# Altium PCB kvm.PcbDoc
Units mil, origin at the board's own origin, x right, y up, seen from the top; angles counter-clockwise.
Board outline 6305.65 x 2713.58 mil, 4 copper layers (Top Layer, GND 1, GND2, Bottom Layer), stack 61.12 mil thick; 1 components, 20 nets, 36 pads, 389 vias.
Unrouted connection lines stored in the file: 15.
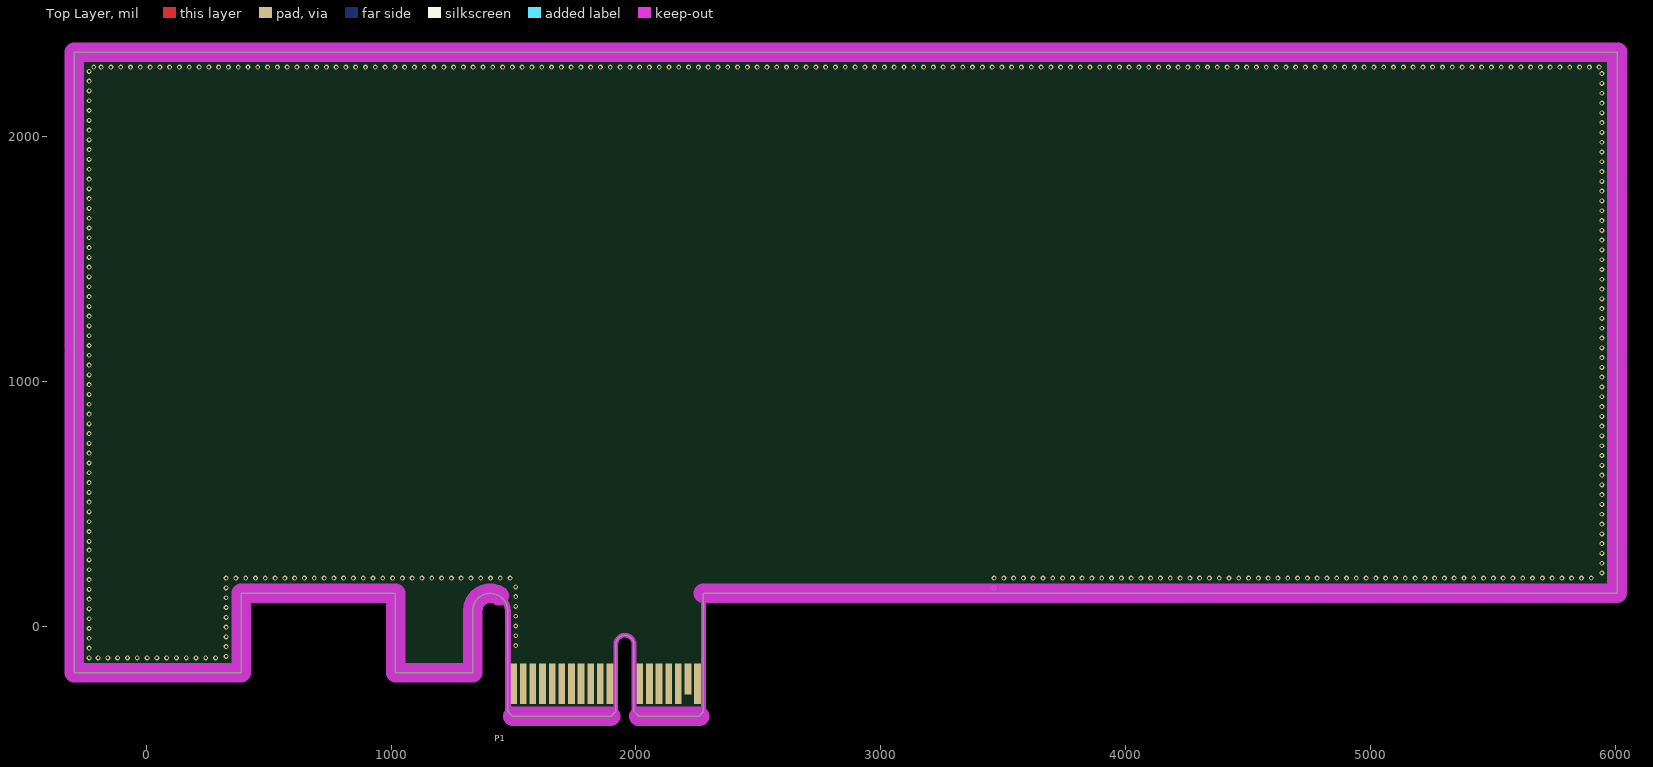
[diagram p0: Top Layer view]
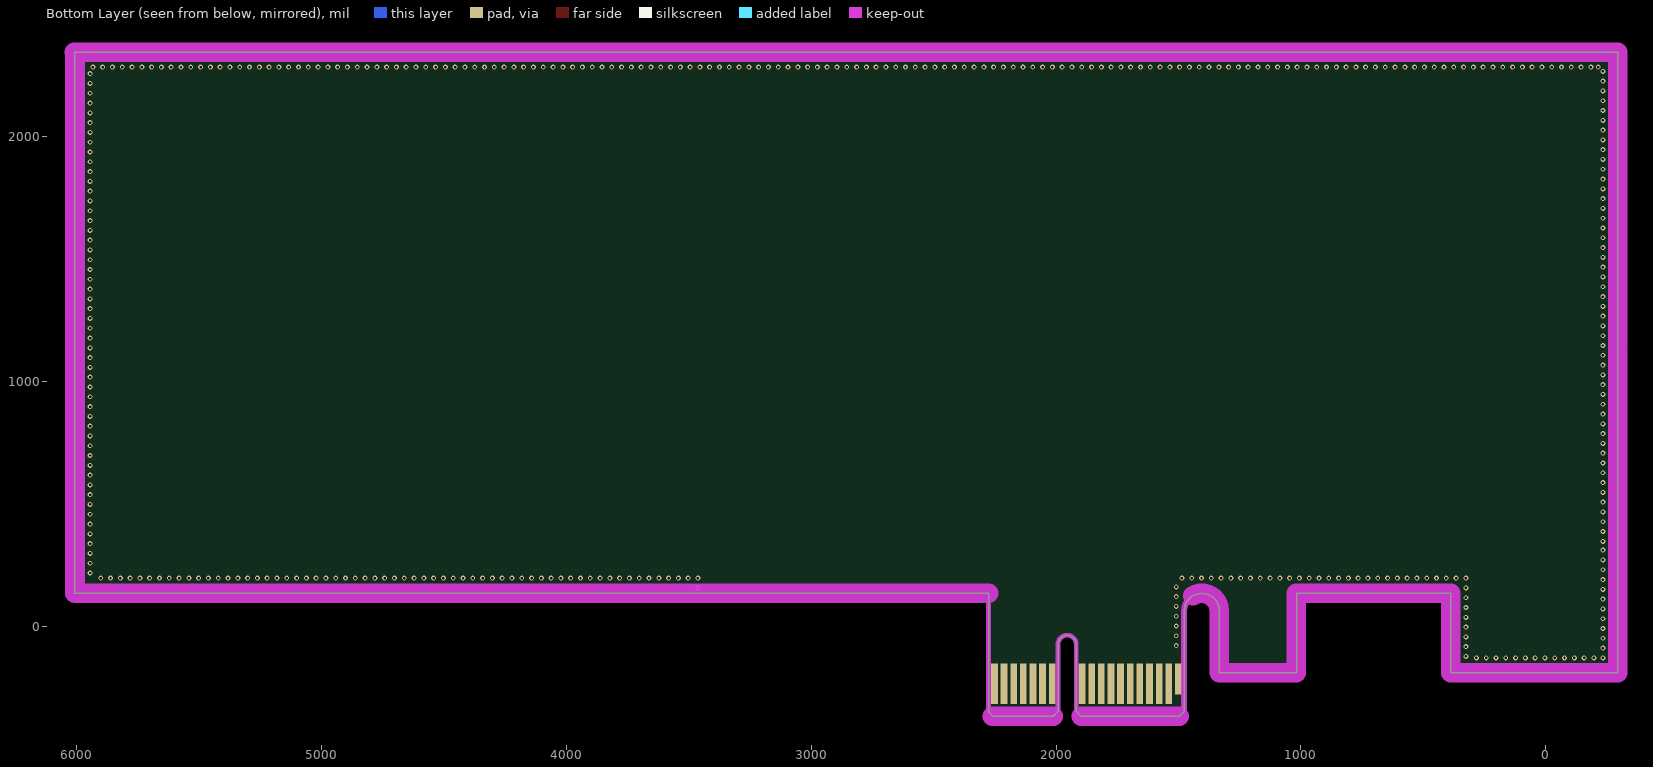
[diagram p1: Bottom Layer view, seen from below]
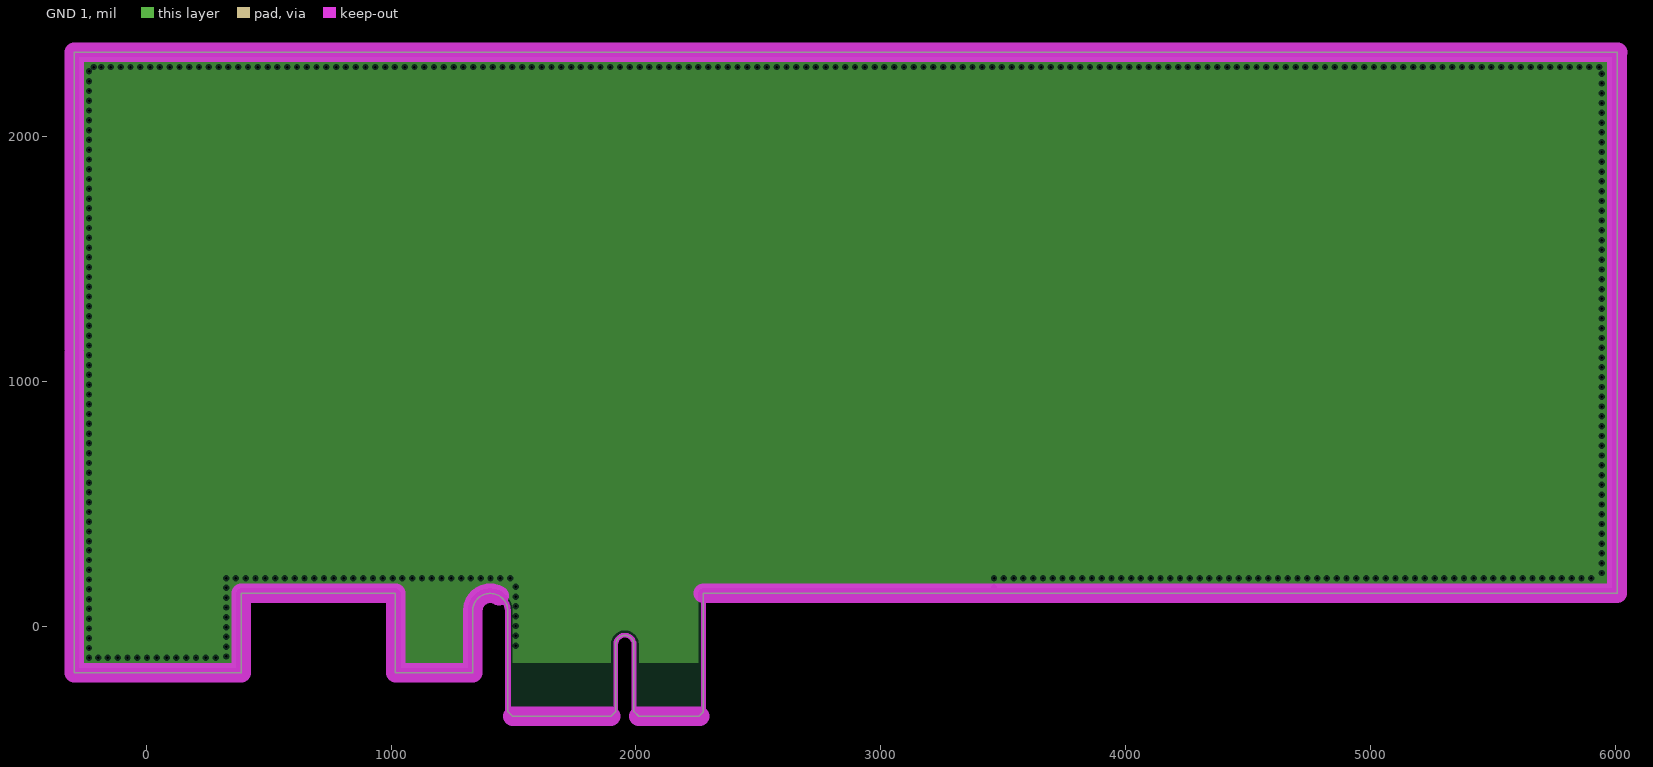
[diagram p2: GND 1, clearances drawn from the general rule]
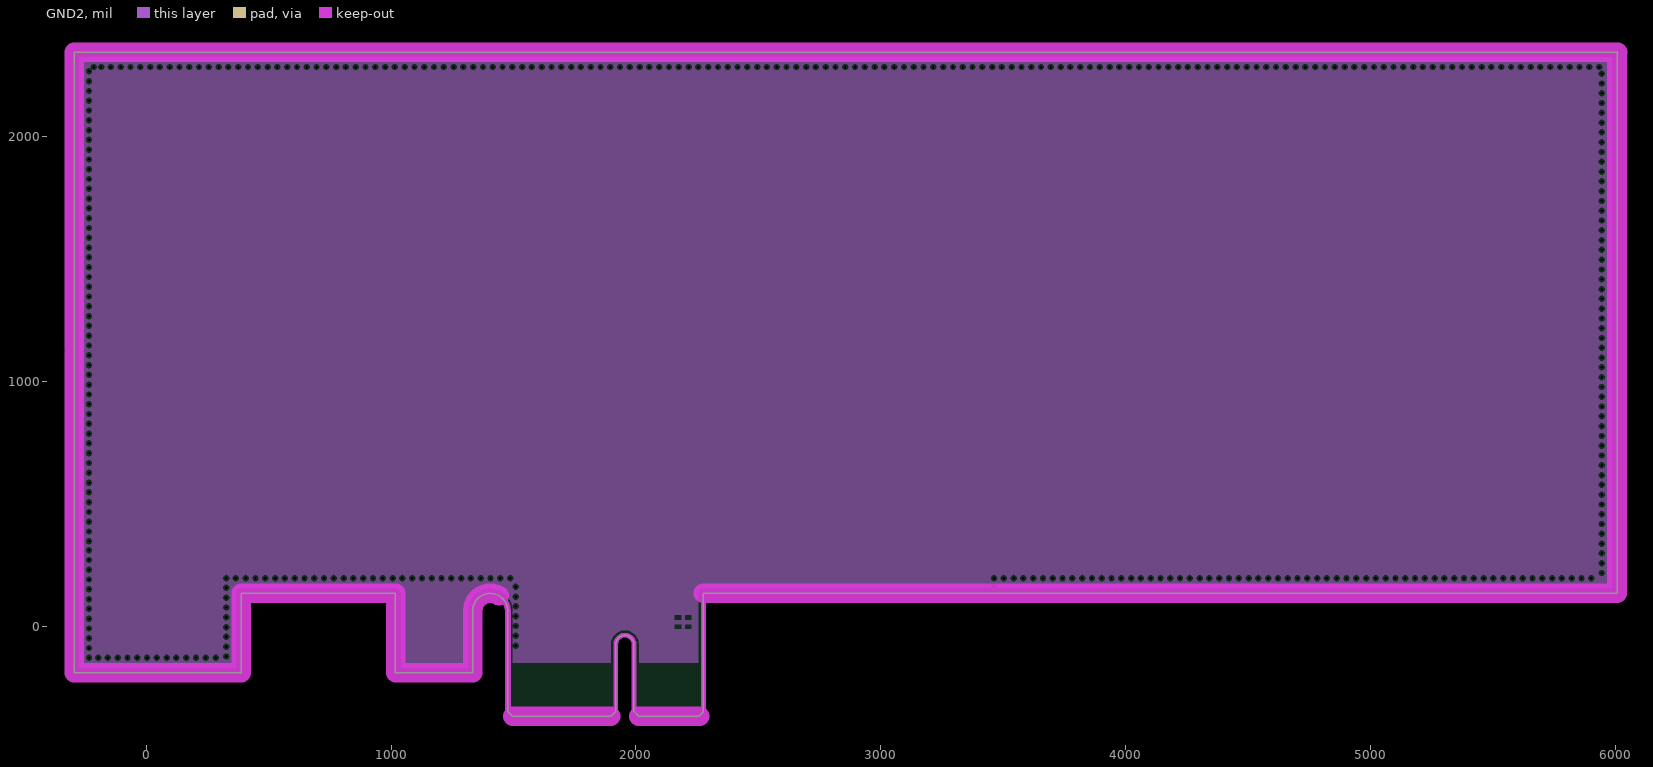
[diagram p3: GND2, clearances drawn from the general rule]

## Layer stack, top to bottom
Board Layer Stack Top Solder: solder mask 0.6, SM-001, Dk 4
Top Layer: signal copper 1.6
Dielectric 1: prepreg 3.36, 1078RC69, Dk 4.12
GND 1: plane copper 0.6
Dielectric 4: core 50, 1078, Dk 4.4
GND2: plane copper 0.6
Dielectric 7: prepreg 3.36, 1078RC69, Dk 4.12
Bottom Layer: signal copper 1.6
Board Layer Stack Bottom Solder: solder mask 0.6, SM-001, Dk 4

## Board outline
2257.99,-368.34 2276,-350.33 2276,134.43 6009.86,134.43 6010.13,134.7 6010.13,2344.94 6009.86,2345.2 -295.25,2345.2 -295.52,2344.94 -295.25,-191.16 387.21,-191.16 387.48,-190.89 387.48,133.65 1017.46,133.65 1017.46,-190.89 1017.73,-191.16 1332.75,-191.16 1333.01,-190.89 1333.01,62.06 cw(c1404.57,62.06) 1476.12,62.06 1476.12,-348.33 1476.2,-348.52 1495.98,-368.3 1496.17,-368.38 1897.65,-368.38 1897.84,-368.29 1917.6,-348.52 1917.68,-348.33 1917.68,-74.8 cw(c1954.74,-74.8) 1991.8,-74.8 1991.8,-348.38 1991.88,-348.57 2011.57,-368.26 2011.76,-368.34

## Design rules (kind name [scope] priority, off if disabled: settings)
AcuteAngle [All] p1: isadvanced=TRUE minimum=6.00000000000000E+0001 checktracksonly=FALSE
AssemblyTestPointUsage [All] p1: isadvanced=TRUE
AssemblyTestpoint [All] p1: isadvanced=TRUE testpointundercomponent=TRUE minsize=40 maxsize=100 preferedsize=60 minholesize=0 maxholesize=40 preferedholesize=32 testpointgrid=1 usegrid=TRUE gridtolerance=0.01 allowsidetop=TRUE allowsidebottom=TRUE
Clearance Clearance_Differential [InAnyDifferentialPair vs OnTopLayer    or OnBottomLayer    or OnLayer('PWR/SIG1')] p1: isadvanced=TRUE gap=5 ignorepadtopadclearanceinfootprint=TRUE except(0: SMDPad-Region; 4: Arc-Arc Arc-Track Track-Track; 8: Arc-Hole Track-Hole SMDPad-Hole THPad-Hole Via-Hole Fill-Hole Poly-Hole Region-Hole Text-Hole; 10: Arc-Poly Track-Poly)
Clearance Clearance_BGA [WithinRoom('08_25G2SS Port 0 Port 1 - SFP28') or WithinRoom('08_25G2SS Port 0 - SFP28')] p2: isadvanced=TRUE gap=5 ignorepadtopadclearanceinfootprint=TRUE except(0: SMDPad-Via SMDPad-Hole; 4: Track-SMDPad; 8: Arc-Hole Track-Hole THPad-Hole Via-Hole Fill-Hole Poly-Hole Region-Hole Text-Hole)
Clearance "Clearance_SNC_Via on Pad" [InPadClass('Via on Pad')] p3: isadvanced=TRUE gap=5 ignorepadtopadclearanceinfootprint=TRUE except(0: SMDPad-Via SMDPad-Region SMDPad-Hole; 8: Arc-Hole Track-Hole THPad-Hole Via-Hole Fill-Hole Poly-Hole Region-Hole Text-Hole)
Clearance Clearance_1 [OnMid vs OnMid] p4: gap=10 ignorepadtopadclearanceinfootprint=FALSE sourcerule=53 cellrowname=All cellrowtype=0 cellcolname=All cellcoltype=0 innerlayers=TRUE
Clearance Clearance_2 [(ExistsOnLayer('Top Layer') Or ExistsOnLayer('Bottom Layer')) vs (ExistsOnLayer('Top Layer') Or ExistsOnLayer('Bottom Layer'))] p5: gap=10 ignorepadtopadclearanceinfootprint=FALSE sourcerule=53 cellrowname=All cellrowtype=0 cellcolname=All cellcoltype=0 outerlayers=TRUE
Clearance [All] p6: gap=5 ignorepadtopadclearanceinfootprint=FALSE except(8: Arc-Hole Track-Hole SMDPad-Hole THPad-Hole Via-Hole Fill-Hole Poly-Hole Region-Hole Text-Hole; 15: Fill-Fill Fill-Poly Fill-Region Poly-Poly Poly-Region Region-Region) ismatrix=TRUE
ComponentClearance ComponentClearance_TP [HasFootprint('TP_SMD_030RD')] p1: isadvanced=TRUE gap=10 collisioncheckmode=3 verticalgap=100000 showdistances=FALSE
ComponentClearance [not HasFootprint ('TP_SMD_030RD')] p2: isadvanced=TRUE gap=10 collisioncheckmode=3 verticalgap=10 showdistances=FALSE
DiffPairsRouting DifferentialPairsRouting_1 [All] p1: maxlimit=10 minlimit=10 mostfreqgap=10 toplayer_minwidth=15 toplayer_maxwidth=15 toplayer_prefwidth=15 bottomlayer_minwidth=15 bottomlayer_maxwidth=15 bottomlayer_prefwidth=15 maxuncoupledlength=500
FabricationTestPointUsage [All] p1: isadvanced=TRUE valid=0 allowmultiple=FALSE
FabricationTestpoint [All] p1: isadvanced=TRUE side=3 testpointundercomponent=TRUE minsize=40 maxsize=100 preferedsize=60 minholesize=0 maxholesize=40 preferedholesize=32 testpointgrid=1 allowsidetop=TRUE allowsidebottom=TRUE usegrid=TRUE gridtolerance=0.01
FanoutControl Fanout_BGA [IsBGA] p1: isadvanced=TRUE bgadir=Out bgaviamode=Centered fanoutstyle=UnderPads fanoutdirection=Alternating viagrid=1 // Fanout_BGA (Default Rule)
FanoutControl Fanout_LCC [IsLCC] p2: isadvanced=TRUE bgadir=Out bgaviamode=Centered fanoutstyle=Auto fanoutdirection=Alternating viagrid=1 // Fanout_LCC (Default Rule)
FanoutControl Fanout_SOIC [IsSOIC] p3: isadvanced=TRUE bgadir=Out bgaviamode=Centered fanoutstyle=Auto fanoutdirection=Alternating viagrid=1 // Fanout_SOIC (Default Rule)
FanoutControl Fanout_Small [(CompPinCount < 5)] p4: isadvanced=TRUE bgadir=Out bgaviamode=Centered fanoutstyle=Rows fanoutdirection=OutOnly viagrid=1 // Fanout_Small (Default Rule)
FanoutControl Fanout_Default [All] p5: isadvanced=TRUE bgadir=Out bgaviamode=Centered fanoutstyle=Rows fanoutdirection=OutOnly viagrid=1 // Fanout_Default (Default Rule)
Height [All] p1: isadvanced=TRUE minheight=0 maxheight=1000 prefheight=500
HoleSize HoleSize_BGA [WithinRoom('08_25G2SS Port 0 - SFP28') or WithinRoom('08_25G2SS Port 0 Port 1 - SFP28')] p1: isadvanced=TRUE absolutevalues=TRUE maxlimit=100 minlimit=8 maxpercent=80.000 minpercent=20.000
HoleSize [All] p2: isadvanced=TRUE absolutevalues=TRUE maxlimit=200 minlimit=10 maxpercent=80.000 minpercent=20.000
HoleToHoleClearance [All] p1: isadvanced=TRUE gap=10 allowstackedmicrovias=FALSE
LayerPairs [All] p1: isadvanced=TRUE enforce=TRUE
MatchedLengths "MatchedLengths-DIF PAIRS" [InAnyDifferentialPair] p1: isadvanced=TRUE tolerance=2 checknetsindiffpair=TRUE checkdiffpairvsdiffpair=FALSE checkxsignals=FALSE checkothers=FALSE
MinimumAnnularRing MinimumAnnularRing_BGA [WithinRoom('08_25G2SS Port 0 - SFP28')    or WithinRoom('08_25G2SS Port 0 Port 1 - SFP28')] p1: isadvanced=TRUE minimumring=3
MinimumAnnularRing [All] p2: isadvanced=TRUE minimumring=4
MinimumSolderMaskSliver [All] p1: isadvanced=TRUE minsoldermaskwidth=3.94
NetAntennae [All] p1: isadvanced=TRUE netantennaetolerance=0
PasteMaskExpansion [All] p1: isadvanced=TRUE expansion=0
PlaneClearance [All] p1: isadvanced=TRUE clearance=8
PlaneConnect [All] p1: isadvanced=TRUE planeconnectstyle=Direct reliefexpansion=20 reliefentries=4 reliefconductorwidth=10 reliefairgap=10
PolygonConnect power [InNetClass('Power_nets') OR InNet('GND') OR InNet('NetC208_2')] p1: isadvanced=TRUE connectstyle=Direct reliefconductorwidth=10 reliefentries=4 polygonreliefangle="90 Angle" airgapwidth=10
PolygonConnect [All] p2: connectstyle=Relief reliefconductorwidth=10 reliefentries=4 polygonreliefangle="90 Angle" airgapwidth=10
RoutingCorners [All] p1: isadvanced=TRUE cornerstyle=45-Degree minsetback=100 maxsetback=100
RoutingLayers RoutingLayers_1 [InDifferentialPairClass('All Differential Pairs')] p1: isadvanced=TRUE top layer_v5=TRUE bottom layer_v5=TRUE
RoutingLayers [All] p2: top layer_v5=TRUE bottom layer_v5=TRUE
RoutingPriority [All] p1: isadvanced=TRUE routingpriority=0
RoutingVias BGA_VIPPO [InComponent('U1')] p1: isadvanced=TRUE holewidth=8 width=16 viastyle="Through Hole" minholewidth=8 minwidth=16 maxholewidth=8 maxwidth=16
RoutingVias [not IsBGA] p2: isadvanced=TRUE holewidth=10 width=20 viastyle="Through Hole" minholewidth=8 minwidth=14 maxholewidth=10 maxwidth=20
RoutingVias RoutingViaStyle_1 [All] p3: holewidth=28 width=50 viastyle="Through Hole" minholewidth=28 minwidth=50 maxholewidth=28 maxwidth=50
ShortCircuit room [All vs WithinRoom('08_25G2SS Port 0 - SFP28') or  WithinRoom('08_25G2SS Port 0 Port 1 - SFP28')] p1: isadvanced=TRUE allowed=TRUE
ShortCircuit ShortCircuit_1 [All vs not WithinRoom('08_25G2SS Port 0 - SFP28')] p2: isadvanced=TRUE allowed=FALSE
SilkToSilkClearance [All] p1: isadvanced=TRUE silktosilkclearance=4
SilkToSolderMaskClearance [IsText] p1: isadvanced=TRUE minsilkscreentomaskgap=3 clearancetoexposedcopper=FALSE
SolderMaskExpansion [All] p1: isadvanced=TRUE expansion=4 istentingtop=FALSE
SupplyNets "Schematic Supply Nets_1" [InNet('12V_PCIE')] p1: isadvanced=TRUE voltage=0.000
SupplyNets "Schematic Supply Nets" [InNet('3V3_PCIE')] p2: isadvanced=TRUE voltage=0.000
UnRoutedNet [All] p1: isadvanced=TRUE
UnpouredPolygon [All] p1: isadvanced=TRUE
Width Width_BGA [WithinRoom('08_25G2SS Port 0 - SFP28')or WithinRoom('08_25G2SS Port 0 - SFP_1')] p1: isadvanced=TRUE maxlimit=15 minlimit=5 preferedwidth=5
Width [All] p2: maxlimit=10 minlimit=10 preferedwidth=10
2 further rules are at their usual default settings.

## Components (designator, comment, footprint, x,y, rotation, side; value= is the part's Value field where it differs from the comment)
P1 "PCIUV32BIT" GF-2D-1000-1K-O98 1874.21,-235.43 r0 top

## Footprints (in the part's own frame and the unit in brackets; to place one, negate y for a bottom-side part, rotate by r counter-clockwise, add the part's x,y. Pads: shape width x height; smd on the part's side, far side on the other; paste and mask are expansions set on the pad)
GF-2D-1000-1K-O98 [mm]
  rect 0.7x3.2 smd far side paste-2.54 mask+0: A1(-9.5,0.5)
  rect 0.7x4.2 smd far side paste-2.54 mask+0: A2(-8.5,0) A3(-7.5,0) A4(-6.5,0) A5(-5.5,0) A6(-4.5,0) A7(-3.5,0) A8(-2.5,0) A9(-1.5,0) A10(-0.5,0) A11(0.5,0) A12(3.596,0) A13(4.596,0) A14(5.596,0) A15(6.596,0) A16(7.596,0) A17(8.596,0) A18(9.596,0)
  rect 0.7x4.2 smd paste-2.54 mask+0: B1(-9.5,0) B2(-8.5,0) B3(-7.5,0) B4(-6.5,0) B5(-5.5,0) B6(-4.5,0) B7(-3.5,0) B8(-2.5,0) B9(-1.5,0) B10(-0.5,0) B11(0.5,0) B12(3.596,0) B13(4.596,0) B14(5.596,0) B15(6.596,0) B16(7.596,0) B18(9.596,0)
  rect 0.7x3.2 smd paste-2.54 mask+0: B17(8.596,0.5)

## Part data
P1: "Card Edge, 98-Position"

## Via types
v1: diameter 20, hole 10, Top Layer to Bottom Layer, tented both sides, 389 vias

## Nets (pads, with @x,y where several pads share a name; then routed paths per layer and width w, separated by ;. In a path a pad name is that pad's centre, name@x,y a point inside that pad or via, vN(x,y) a via of type N, cw(c..) or ccw(c..) an arc to the next point about the centre after c; other vN are vias at no path point)
3V3_PCIE: P1.A9 P1.A10 P1.B8 P1.B10
12V_PCIE: P1.A2 P1.A3 P1.B1 P1.B2 P1.B3
NetP1_A1: P1.A1 P1.A11
NetP1_A4: P1.A4 P1.A12 P1.A15 P1.A18
NetP1_A5: P1.A5
NetP1_A6: P1.A6
NetP1_A7: P1.A7
NetP1_A8: P1.A8
NetP1_A13: P1.A13 | length 15.5
  Bottom Layer w4.5: P1.A13@2055.16,-174.69 cw(c2074.84,-174.69) P1.A13@2060.92,-160.77
NetP1_A14: P1.A14
NetP1_A16: P1.A16
NetP1_A17: P1.A17
NetP1_B4: P1.B4 P1.B7 P1.B13 P1.B16 P1.B18
NetP1_B5: P1.B5
NetP1_B6: P1.B6
NetP1_B9: P1.B9
NetP1_B11: P1.B11
NetP1_B12: P1.B12
NetP1_B14: P1.B14
NetP1_B15: P1.B15
pads on no net: P1.B17
copper on no net:
  other v1: -234.27,-129.79 -197.27,-129.79 -157.27,-129.79 -117.27,-129.79 -77.27,-129.79 -37.29,-129.79 2.71,-129.79 42.71,-129.79 82.73,-129.79 122.73,-129.79 162.73,-129.79 202.71,-129.79 242.71,-129.79 282.71,-129.79 325.81,-124.11 -234.27,-89.79 325.81,-84.11 1508.97,-79.67 -234.27,-49.8 325.81,-44.11 1508.97,-39.67 -234.27,-9.8 325.81,-4.11 1508.97,0.33 -234.27,30.2 325.81,35.89 1508.97,40.33 -234.27,70.2 325.81,75.89 1508.97,80.33 -234.27,110.18 325.81,115.89 1508.97,120.33 -234.27,150.18 325.81,155.89 3463,156.09 1508.97,160.33 -234.27,190.18 325.81,195.89 365.81,195.89 405.81,195.89 445.81,195.89 485.81,195.89 525.81,195.89 565.81,195.89 605.81,195.89 645.81,195.89 685.81,195.89 725.81,195.89 765.81,195.89 805.81,195.89 845.81,195.89 885.81,195.89 925.81,195.89 965.81,195.89 1005.81,195.89 1045.81,195.89 1085.81,195.89 1125.81,195.89 1165.81,195.89 1205.81,195.89 1245.81,195.89 1285.81,195.89 1325.81,195.89 1365.81,195.89 1405.81,195.89 1445.81,195.89 1485.81,195.89 3463,196.09 3503,196.09 3543,196.09 3583,196.09 3623,196.09 3663,196.09 3703,196.09 3743,196.09 3783,196.09 3823,196.09 3863,196.09 3903,196.09 3943,196.09 3983,196.09 4023,196.09 4063,196.09 4103,196.09 4143,196.09 4183,196.09 4223,196.09 4263,196.09 4303,196.09 4343,196.09 4383,196.09 4423,196.09 4463,196.09 4503,196.09 4543,196.09 4583,196.09 4623,196.09 4663,196.09 4703,196.09 4743,196.09 4783,196.09 4823,196.09 4863,196.09 4903,196.09 4943,196.09 4983,196.09 5023,196.09 5063,196.09 5103,196.09 5143,196.09 5183,196.09 5223,196.09 5263,196.09 5303,196.09 5343,196.09 5383,196.09 5423,196.09 5463,196.09 5503,196.09 5543,196.09 5583,196.09 5623,196.09 5663,196.09 5703,196.09 5743,196.09 5783,196.09 5823,196.09 5863,196.09 5903,196.09 5946.42,216.87 -234.27,230.16 5946.42,256.87 -234.27,270.16 5946.42,296.87 -234.27,310.16 5946.42,336.87 -234.27,346.35 5946.42,376.87 -234.27,386.35 5946.42,416.87 -234.27,426.35 5946.42,456.87 -234.27,466.35 5946.42,496.87 -234.27,506.35 5946.42,536.87 -234.27,546.35 5946.42,576.87 -234.27,586.35 5946.42,616.87 -234.27,626.35 5946.42,656.87 -234.27,666.35 5946.42,696.87 -234.27,706.35 5946.42,736.87 -234.27,746.35 5946.42,776.87 -234.27,786.35 5946.42,816.87 -234.27,826.35 5946.42,856.87 -234.27,866.35 5946.42,896.87 -234.27,906.35 5946.42,936.87 -234.27,946.35 5946.42,976.87 -234.27,986.35 5946.42,1016.87 -234.27,1026.35 5946.42,1056.87 -234.27,1066.35 5946.42,1096.87 -234.27,1106.35 5946.42,1136.87 -234.27,1146.35 5946.42,1176.87 -234.27,1186.35 5946.42,1216.87 -234.27,1226.35 5946.42,1256.87 -234.27,1266.35 5946.42,1296.87 -234.27,1306.35 5946.42,1336.87 -234.27,1346.35 5946.42,1376.87 -234.27,1386.35 5946.42,1416.87 -234.27,1426.35 5946.42,1456.87 -234.27,1466.35 5946.42,1496.87 -234.27,1506.35 5946.42,1536.87 -234.27,1546.35 5946.42,1576.87 -234.27,1586.35 5946.42,1616.87 -234.27,1626.35 5946.42,1656.87 -234.27,1666.35 5946.42,1696.87 -234.27,1706.35 5946.42,1736.87 -234.27,1746.35 5946.42,1776.87 -234.27,1786.35 5946.42,1816.87 -234.27,1826.35 5946.42,1856.87 -234.27,1866.35 5946.42,1896.87 -234.27,1906.35 5946.42,1936.87 -234.27,1946.35 5946.42,1976.87 -234.27,1986.34 5946.42,2016.87 -234.27,2026.34 5946.42,2056.87 -234.27,2066.34 5946.42,2096.87 -234.27,2106.34 5946.42,2136.87 -234.27,2146.32 5946.42,2176.87 -234.27,2186.32 5946.42,2216.87 -234.27,2226.32 5946.42,2256.87 -234.27,2266.32 -215,2284 -184.88,2284 -144.88,2284 -104.88,2284 -64.88,2284 -24.88,2284 15.12,2284 55.12,2284 95.12,2284 135.12,2284 175.12,2284 215.12,2284 255.12,2284 295.12,2284 335.12,2284 375.12,2284 415.12,2284 455.12,2284 495.12,2284 535.12,2284 575.12,2284 615.12,2284 655.12,2284 695.12,2284 735.12,2284 775.12,2284 815.12,2284 855.12,2284 895.12,2284 935.12,2284 975.12,2284 1015.12,2284 1055.12,2284 1095.12,2284 1135.12,2284 1175.12,2284 1215.12,2284 1255.12,2284 1295.12,2284 1335.12,2284 1375.12,2284 1415.12,2284.02 1455.12,2284.02 1495.12,2284 1535.12,2284 1575.12,2284 1615.12,2284 1655.12,2284 1695.12,2284 1735.12,2284 1775.12,2284 1815.12,2284 1855.12,2284 1895.12,2284 1935.12,2284 1975.12,2284 2015.12,2284 2055.12,2284 2095.12,2284 2135.12,2284 2175.12,2284 2215.12,2284 2255.12,2284 2295.12,2284 2335.12,2284 2375.12,2284 2415.12,2284 2455.12,2284 2495.12,2284 2535.12,2284 2575.12,2284 2615.12,2284 2655.12,2284 2695.12,2284 2735.12,2284 2775.12,2284 2815.12,2284 2855.12,2284 2895.12,2284 2935.12,2284 2975.12,2284 3015.12,2284 3055.12,2284 3095.12,2284 3135.12,2284 3175.12,2284 3215.12,2284 3255.12,2284 3295.12,2284 3335.12,2284 3375.12,2284 3415.12,2284 3455.12,2284 3495.12,2284 3535.12,2284 3575.12,2284 3615.12,2284 3655.12,2284 3695.12,2284 3735.12,2284 3775.12,2284 3815.12,2284 3855.12,2284 3895.12,2284 3935.12,2284 3975.12,2284 4015.12,2284 4055.12,2284 4095.12,2284 4135.12,2284 4175.12,2284 4215.12,2284 4255.12,2284 4295.12,2284 4335.12,2284 4375.12,2284 4415.12,2284 4455.12,2284 4495.12,2284 4535.12,2284 4575.12,2284 4615.12,2284 4655.12,2284 4695.12,2284 4735.12,2284 4775.12,2284 4815.12,2284 4855.12,2284 4895.12,2284 4935.12,2284 4975.12,2284 5015.12,2284 5055.12,2284 5095.12,2284 5135.12,2284 5175.12,2284 5215.12,2284 5255.12,2284 5295.12,2284 5335.12,2284 5375.12,2284 5415.12,2284 5455.12,2284 5495.12,2284 5535.12,2284 5575.12,2284 5615.12,2284 5655.12,2284 5695.12,2284 5735.12,2284 5775.12,2284 5815.12,2284 5855.12,2284 5895.12,2284 5935.12,2284

## Polygon pours and split planes (outlines as drawn)
no net on GND 1 (split plane): 5990.03,154.53 2276,154.53 2272.08,154.15 2268.31,153 2264.83,151.14 2261.79,148.65 2259.29,145.6 2257.43,142.13 2256.29,138.36 2255.9,134.43 2255.9,-152.48 2011.9,-152.48 2011.9,-74.8 2011.89,-74.64 2011.54,-68.4 2010.46,-62.09 2008.69,-55.93 2006.23,-50.01 2003.13,-44.4 1999.43,-39.17 1995.16,-34.39 1990.38,-30.12 1985.15,-26.41 1979.54,-23.31 1973.62,-20.86 1967.46,-19.09 1961.14,-18.01 1954.74,-17.65 1948.35,-18.01 1942.03,-19.09 1935.87,-20.86 1929.95,-23.31 1924.34,-26.41 1919.11,-30.12 1914.33,-34.39 1910.06,-39.17 1906.35,-44.4 1903.25,-50.01 1900.8,-55.93 1899.03,-62.09 1897.95,-68.4 1897.6,-74.64 1897.59,-74.8 1897.59,-152.48 1496.22,-152.48 1496.22,62.06 1496.2,62.24 1495.86,70.05 1494.82,77.98 1493.09,85.78 1490.69,93.41 1487.63,100.79 1483.93,107.88 1479.64,114.63 1474.77,120.97 1469.37,126.86 1463.48,132.26 1457.13,137.13 1450.39,141.43 1443.3,145.12 1435.91,148.18 1428.29,150.58 1420.48,152.31 1412.56,153.36 1404.57,153.7 1396.58,153.36 1388.66,152.31 1380.85,150.58 1373.23,148.18 1365.84,145.12 1358.75,141.43 1352.01,137.13 1345.66,132.26 1339.77,126.86 1334.37,120.97 1329.5,114.63 1325.21,107.88 1321.51,100.79 1318.45,93.41 1316.05,85.78 1314.32,77.98 1313.28,70.05 1312.94,62.24 1312.92,62.06 1312.92,-171.06 1037.56,-171.06 1037.56,133.65 1037.18,137.57 1036.03,141.34 1034.17,144.81 1031.68,147.86 1028.63,150.36 1025.16,152.21 1021.39,153.36 1017.46,153.74 387.48,153.74 383.56,153.36 379.79,152.21 376.31,150.36 373.27,147.86 370.77,144.81 368.91,141.34 367.77,137.57 367.38,133.65 367.38,-171.06 -275.16,-171.06 -275.42,2325.11 5990.03,2325.11
no net on GND2 (split plane): 5990.03,154.53 2276,154.53 2272.08,154.15 2268.31,153 2264.83,151.14 2261.79,148.65 2259.29,145.6 2257.43,142.13 2256.29,138.36 2255.9,134.43 2255.9,-152.48 2011.9,-152.48 2011.9,-74.8 2011.89,-74.64 2011.54,-68.4 2010.46,-62.09 2008.69,-55.93 2006.23,-50.01 2003.13,-44.4 1999.43,-39.17 1995.16,-34.39 1990.38,-30.12 1985.15,-26.41 1979.54,-23.31 1973.62,-20.86 1967.46,-19.09 1961.14,-18.01 1954.74,-17.65 1948.35,-18.01 1942.03,-19.09 1935.87,-20.86 1929.95,-23.31 1924.34,-26.41 1919.11,-30.12 1914.33,-34.39 1910.06,-39.17 1906.35,-44.4 1903.25,-50.01 1900.8,-55.93 1899.03,-62.09 1897.95,-68.4 1897.6,-74.64 1897.59,-74.8 1897.59,-152.48 1496.22,-152.48 1496.22,62.06 1496.2,62.24 1495.86,70.05 1494.82,77.98 1493.09,85.78 1490.69,93.41 1487.63,100.79 1483.93,107.88 1479.64,114.63 1474.77,120.97 1469.37,126.86 1463.48,132.26 1457.13,137.13 1450.39,141.43 1443.3,145.12 1435.91,148.18 1428.29,150.58 1420.48,152.31 1412.56,153.36 1404.57,153.7 1396.58,153.36 1388.66,152.31 1380.85,150.58 1373.23,148.18 1365.84,145.12 1358.75,141.43 1352.01,137.13 1345.66,132.26 1339.77,126.86 1334.37,120.97 1329.5,114.63 1325.21,107.88 1321.51,100.79 1318.45,93.41 1316.05,85.78 1314.32,77.98 1313.28,70.05 1312.94,62.24 1312.92,62.06 1312.92,-171.06 1037.56,-171.06 1037.56,133.65 1037.18,137.57 1036.03,141.34 1034.17,144.81 1031.68,147.86 1028.63,150.36 1025.16,152.21 1021.39,153.36 1017.46,153.74 387.48,153.74 383.56,153.36 379.79,152.21 376.31,150.36 373.27,147.86 370.77,144.81 368.91,141.34 367.77,137.57 367.38,133.65 367.38,-171.06 -275.16,-171.06 -275.42,2325.11 5990.03,2325.11

## Keep-outs
Keep-Out Layer:
  lines w20: 1897.9,-368.05 1917.67,-348.27 1917.67,-74.74 1918.49,-66.98 1920.9,-59.56 1924.8,-52.8 1930.02,-47 1936.33,-42.42 1943.46,-39.24 1951.09,-37.62 1958.9,-37.62 1966.53,-39.24 1973.66,-42.42 1979.97,-47 1985.19,-52.8 1989.09,-59.56 1991.5,-66.98 1992.32,-74.74 1992.32,-348.32 2012.01,-368.01 ; 2257.99,-368.34 2276,-350.33 2276,134.76
  lines w25: 1440.73,124.32 1452.88,115.5 1462.92,104.34 1470.43,91.34 1475.07,77.06 1476.64,62.12 1476.64,-348.27
  lines w80: -295.25,389.46 -295.25,1115.57 ; -295,378.63 -295,160.61 -295,-190.83 387.46,-190.83 387.46,133.97 1017.98,133.97 1017.98,-190.83 1333,-190.83 1333,62.12 1334.57,77.05 1339.21,91.33 1346.72,104.34 1356.76,115.5 1368.91,124.32 1382.63,130.43 1397.31,133.55 1412.33,133.55 1427.01,130.43 1440.73,124.32 ; -295,1135 -295,1314 ; -295,1324 -295,2345 -63,2345 ; -53,2345 6012,2345 ; 1496.42,-368.05 1897.9,-368.05 ; 2012.01,-368.01 2260.74,-368.01 ; 2276,134.76 6008,134.76 6008,655.29 6008,827.97 6008,2345

## Other copper
Bottom Layer:
  pour cut-out: 4075.52,1673.4 4075.52,1689.09
GND 1 (plane layer: these items are gaps in the copper):
  rectangle: 1455.71,-387.8 3496.33,-152.48
  text "2-'.Layer_Name'" at 1325,-675 h60
GND2 (plane layer: these items are gaps in the copper):
  rectangle: 1455.71,-387.8 3496.33,-152.48
  pour cut-out: 3380,6 3405,6 3405,-11.5 3380,-11.5
  pour cut-out: 3380,43.5 3405,43.5 3405,26 3380,26
  pour cut-out: 3421.5,43.5 3446.5,43.5 3446.5,26 3421.5,26
  pour cut-out: 3421.5,6 3446.5,6 3446.5,-11.5 3421.5,-11.5
  pour cut-out: 3222.5,6 3247.5,6 3247.5,-11.5 3222.5,-11.5
  pour cut-out: 3222.5,43.5 3247.5,43.5 3247.5,26 3222.5,26
  pour cut-out: 3264,6 3289,6 3289,-11.5 3264,-11.5
  pour cut-out: 3264,43.5 3289,43.5 3289,26 3264,26
  pour cut-out: 3065.71,6 3090.71,6 3090.71,-11.5 3065.71,-11.5
  pour cut-out: 3065.71,43.5 3090.71,43.5 3090.71,26 3065.71,26
  pour cut-out: 3107.21,43.5 3132.21,43.5 3132.21,26 3107.21,26
  pour cut-out: 3107.21,6 3132.21,6 3132.21,-11.5 3107.21,-11.5
  pour cut-out: 2907.5,6 2932.5,6 2932.5,-11.5 2907.5,-11.5
  pour cut-out: 2907.5,43.5 2932.5,43.5 2932.5,26 2907.5,26
  pour cut-out: 2949,6 2974,6 2974,-11.5 2949,-11.5
  pour cut-out: 2949,43.5 2974,43.5 2974,26 2949,26
  pour cut-out: 2672,6 2697,6 2697,-11.5 2672,-11.5
  pour cut-out: 2672,43.5 2697,43.5 2697,26 2672,26
  pour cut-out: 2713.5,43.5 2738.5,43.5 2738.5,26 2713.5,26
  pour cut-out: 2713.5,6 2738.5,6 2738.5,-11.5 2713.5,-11.5
  pour cut-out: 2515.25,6 2540.25,6 2540.25,-11.5 2515.25,-11.5
  pour cut-out: 2515.25,43.5 2540.25,43.5 2540.25,26 2515.25,26
  pour cut-out: 2556.74,6 2581.74,6 2581.74,-11.5 2556.74,-11.5
  pour cut-out: 2556.74,43.5 2581.74,43.5 2581.74,26 2556.74,26
  pour cut-out: 2356.5,6 2381.5,6 2381.5,-11.5 2356.5,-11.5
  pour cut-out: 2356.5,43.5 2381.5,43.5 2381.5,26 2356.5,26
  pour cut-out: 2398,43.5 2423,43.5 2423,26 2398,26
  pour cut-out: 2398,6 2423,6 2423,-11.5 2398,-11.5
  pour cut-out: 2201,6 2226,6 2226,-11.5 2201,-11.5
  pour cut-out: 2201,43.5 2226,43.5 2226,26 2201,26
  pour cut-out: 2159.5,6 2184.5,6 2184.5,-11.5 2159.5,-11.5
  pour cut-out: 2159.5,43.5 2184.5,43.5 2184.5,26 2159.5,26
  text "5-'.Layer_Name'" at 1300,-650 h60

## Silkscreen, mask and mechanical layers (free items; w line width, h text height)
Top Paste:
  text "'.Layer_Name'" at 1300,-675 h60
Bottom Paste:
  text "'.Layer_Name'" at 1200,-650 h60
Board Layer Stack Top Solder:
  text "Top Solder" at 1250,-675 h60
Board Layer Stack Bottom Solder:
  text "Bottom Solder" at 1200,-650 h60
Board Outline:
  lines w10: 193.16,-190.83 -295,-190.83 ; 193.16,2345 -295,2345 ; -295,-190.83 -295,2345 ; -295,-190.83 387.46,-190.83 ; -295,-190.83 -295,2345 ; -295,-190.83 -295,2345 ; -295,-190.83 387.46,-190.83 ; -295,2345 6010.11,2345 ; -295,2345 6010.11,2345 ; 387.46,-190.83 387.46,133.97 ; 387.46,-190.83 387.46,133.97 ; 387.46,133.97 1017.98,133.97 ; 387.46,133.97 1017.98,133.97 ; 1017.98,-190.83 1017.98,133.97 ; 1017.98,-190.83 1333,-190.83 ; 1017.98,-190.83 1017.98,133.97 ; 1017.98,-190.83 1333,-190.83 ; 1333,-190.83 1333,62.12 ; 1333,-190.83 1333,62.12 ; 1333,62.12 cw(c1404.82,62.12) 1476.64,62.12 ; 1333,62.12 cw(c1404.82,62.12) 1476.64,62.12 ; 1476.64,-348.27 1476.64,62.12 ; 1476.64,-348.27 1496.42,-368.05 ; 1476.64,-348.27 1476.64,62.12 ; 1476.64,-348.27 1496.42,-368.05 ; 1496.42,-368.05 1897.9,-368.05 ; 1496.42,-368.05 1897.9,-368.05 ; 1897.9,-368.05 1917.67,-348.27 ; 1897.9,-368.05 1917.67,-348.27 ; 1917.67,-348.27 1917.67,-74.74 ; 1917.67,-348.27 1917.67,-74.74 ; 1917.67,-74.74 cw(c1954.99,-74.74) 1992.32,-74.74 ; 1917.67,-74.74 cw(c1954.99,-74.74) 1992.32,-74.74 ; 1992.32,-348.32 1992.32,-74.74 ; 1992.32,-348.32 2012.01,-368.01 ; 1992.32,-348.32 1992.32,-74.74 ; 1992.32,-348.32 2012.01,-368.01 ; 2012.01,-368.01 3475.87,-368.01 ; 2012.01,-368.01 3475.87,-368.01 ; 3475.87,-368.01 3496.33,-347.55 ; 3475.87,-368.01 3496.33,-347.55 ; 3496.33,-347.55 3496.33,134.76 ; 3496.33,-347.55 3496.33,134.76 ; 3496.33,134.76 6010.11,134.76 ; 3496.33,134.76 6010.11,134.76 ; 6010.11,134.76 6010.11,2345 ; 6010.11,134.76 6010.11,2345
  text "'.Layer_Name'" at 1200,-775 h60